# EAGLE board grbl_shift_register (EAGLE 9.2.0)
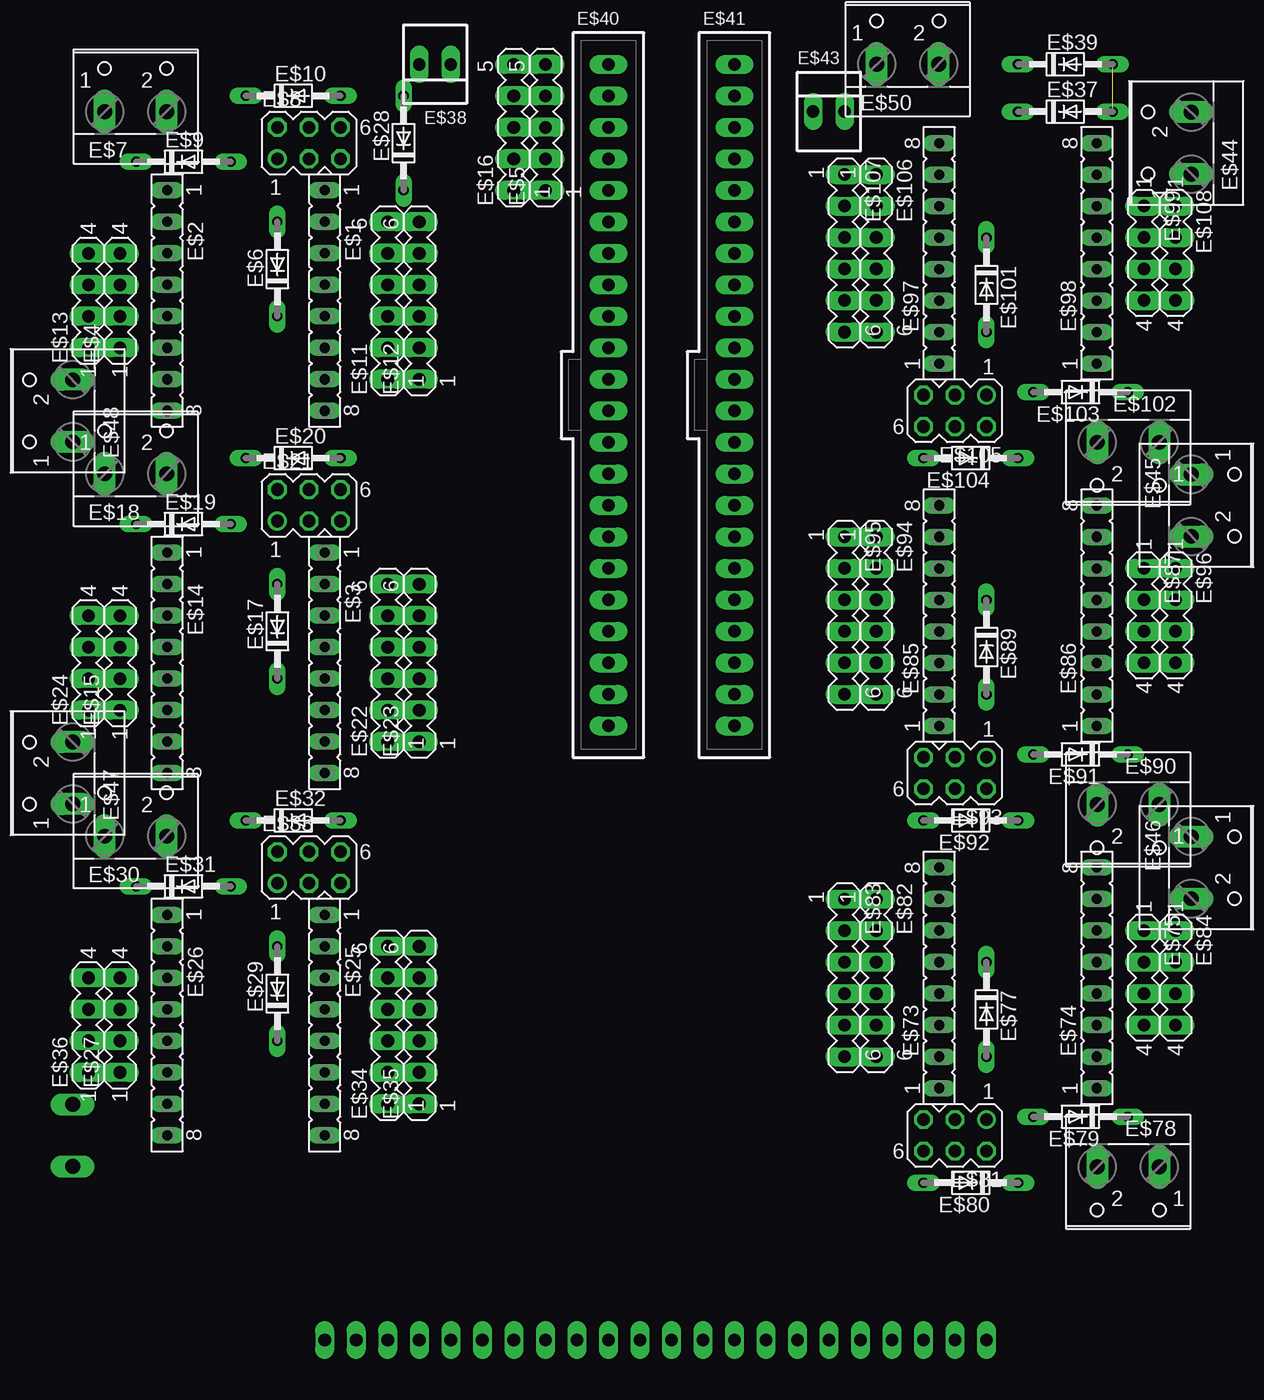
[diagram p0: board, top side]
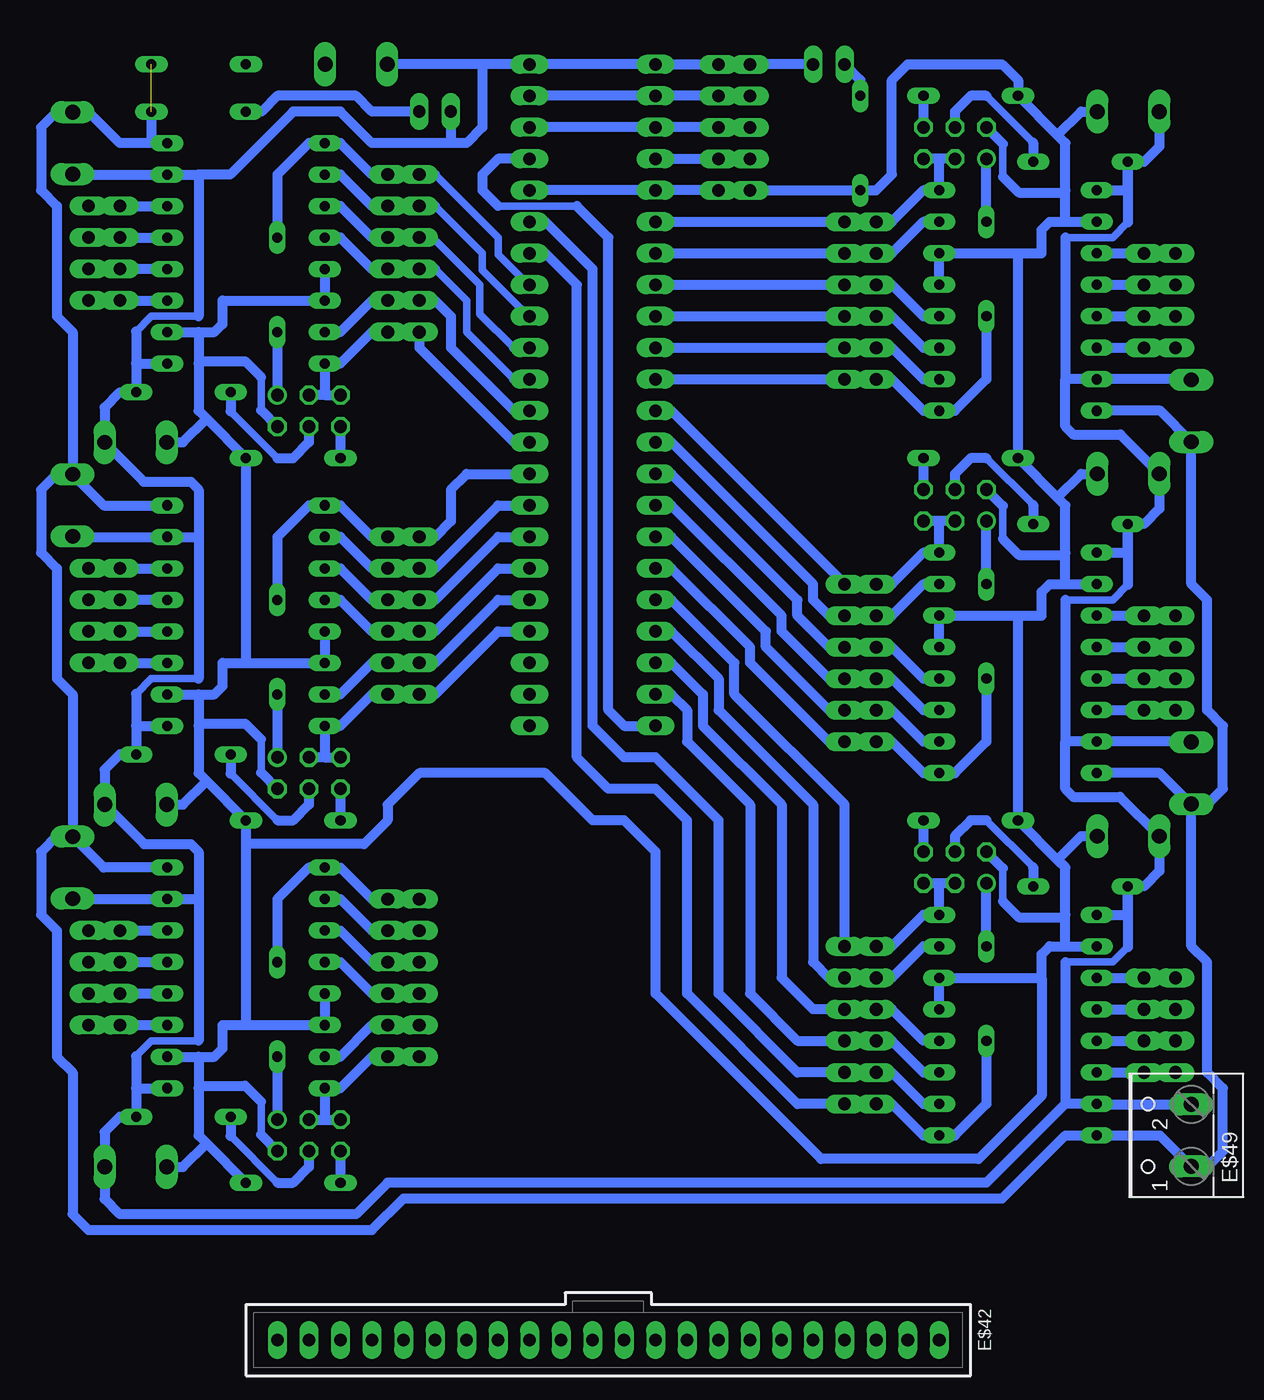
[diagram p1: board, bottom side, seen from below]

No outline drawn. Coordinates in mm, seen from the top.
Copper layers (1*16): Top 0.035mm / dielectric 1.5mm / Bottom 0.035mm
Design rules "default": minimum track width 6mil, minimum drill 0.35mm, track to track 6mil, track to pad 6mil, pad to pad 6mil, via to via 6mil, smd to smd 6mil, copper to edge 40mil, drill to drill 6mil, minimum pad ring 10mil, minimum via ring 8mil, stop-mask expansion 4mil, vias tented up to drill 0mil, thermal gap 10mil

## Footprints (pad centres in the part's own frame; a part is rotated, then mirrored left to right if it is on the bottom)
FE08 = drill 0.813 long: 1 -8.89,0; 2 -6.35,0; 3 -3.81,0; 4 -1.27,0; 5 1.27,0; 6 3.81,0; 7 6.35,0; 8 8.89,0
MA04-1 = drill 1.016 long: 1 -3.81,0; 2 -1.27,0; 3 1.27,0; 4 3.81,0
MA05-1 = drill 1.016 long: 1 -5.08,0; 2 -2.54,0; 3 0,0; 4 2.54,0; 5 5.08,0
DO34-7 = drill 0.813 long: A 3.81,0; C -3.81,0
W237-102 = drill 1.194 long: 1 -2.5,-1.27; 2 2.5,-1.27
MA03-2 = drill 1.016: 1 -2.54,-1.27 | drill 1.016 octagon: 2 -2.54,1.27; 3 0,-1.27; 4 0,1.27; 5 2.54,-1.27; 6 2.54,1.27
MA06-1 = drill 1.016 long: 1 -6.35,0; 2 -3.81,0; 3 -1.27,0; 4 1.27,0; 5 3.81,0; 6 6.35,0
22-23-2021 = drill 1 long: 1 -1.27,0; 2 1.27,0
70543-22 = drill 1.016 long: 1 -26.67,0; 2 -24.13,0; 3 -21.59,0; 4 -19.05,0; 5 -16.51,0; 6 -13.97,0; 7 -11.43,0; 8 -8.89,0; 9 -6.35,0; 10 -3.81,0; 11 -1.27,0; 12 1.27,0; 13 3.81,0; 14 6.35,0; 15 8.89,0; 16 11.43,0; 17 13.97,0; 18 16.51,0; 19 19.05,0; 20 21.59,0; 21 24.13,0; 22 26.67,0

## Placement (x,y rotation side)
E$1  [FE08]  30.48,74.93 270 top
E$2  [FE08]  17.78,74.93 270 top
E$3  [FE08]  30.48,45.72 270 top
E$4  [MA04-1]  13.97,74.93 90 top
E$5  [MA05-1]  48.26,88.9 90 top
E$6  [DO34-7]  26.67,77.47 90 top
E$7  [W237-102]  15.24,91.44 0 top
E$8  [MA03-2]  29.21,87.63 0 top
E$9  [DO34-7]  19.09,86.12 0 top
E$10  [DO34-7]  27.94,91.44 0 top
E$11  [MA06-1]  35.56,74.93 90 top
E$12  [MA06-1]  38.1,74.93 90 top
E$13  [MA04-1]  11.43,74.93 90 top
E$14  [FE08]  17.78,45.72 270 top
E$15  [MA04-1]  13.97,45.72 90 top
E$16  [MA05-1]  45.72,88.9 90 top
E$17  [DO34-7]  26.67,48.26 90 top
E$18  [W237-102]  15.24,62.23 0 top
E$19  [DO34-7]  19.09,56.91 0 top
E$20  [DO34-7]  27.94,62.23 0 top
E$21  [MA03-2]  29.21,58.42 0 top
E$22  [MA06-1]  35.56,45.72 90 top
E$23  [MA06-1]  38.1,45.72 90 top
E$24  [MA04-1]  11.43,45.72 90 top
E$25  [FE08]  30.48,16.51 270 top
E$26  [FE08]  17.78,16.51 270 top
E$27  [MA04-1]  13.97,16.51 90 top
E$28  [DO34-7]  36.83,87.63 90 top
E$29  [DO34-7]  26.67,19.05 90 top
E$30  [W237-102]  15.24,33.02 0 top
E$31  [DO34-7]  19.09,27.7 0 top
E$32  [DO34-7]  27.94,33.02 0 top
E$33  [MA03-2]  29.21,29.21 0 top
E$34  [MA06-1]  35.56,16.51 90 top
E$35  [MA06-1]  38.1,16.51 90 top
E$36  [MA04-1]  11.43,16.51 90 top
E$37  [DO34-7]  90.17,90.17 0 top
E$38  [22-23-2021]  39.37,93.98 180 top
E$39  [DO34-7]  90.17,93.98 0 top
E$40  [70543-22]  53.34,67.31 270 top
E$41  [70543-22]  63.5,67.31 270 top
E$42  [70543-22]  57.15,-8.89 180 bottom
E$43  [22-23-2021]  71.12,90.17 0 top
E$44  [W237-102]  99.06,87.63 90 top
E$45  [W237-102]  101.6,58.42 270 top
E$46  [W237-102]  101.6,29.21 270 top
E$47  [W237-102]  8.89,36.83 90 top
E$48  [W237-102]  8.89,66.04 90 top
E$49  [W237-102]  11.43,7.62 90 bottom
E$50  [W237-102]  77.47,95.25 0 top
E$73  [FE08]  80.01,20.32 90 top
E$74  [FE08]  92.71,20.32 90 top
E$75  [MA04-1]  96.52,20.32 270 top
E$77  [DO34-7]  83.82,17.78 270 top
E$78  [W237-102]  95.25,3.81 180 top
E$79  [DO34-7]  91.4,9.13 180 top
E$80  [DO34-7]  82.55,3.81 180 top
E$81  [MA03-2]  81.28,7.62 180 top
E$82  [MA06-1]  74.93,20.32 270 top
E$83  [MA06-1]  72.39,20.32 270 top
E$84  [MA04-1]  99.06,20.32 270 top
E$85  [FE08]  80.01,49.53 90 top
E$86  [FE08]  92.71,49.53 90 top
E$87  [MA04-1]  96.52,49.53 270 top
E$89  [DO34-7]  83.82,46.99 270 top
E$90  [W237-102]  95.25,33.02 180 top
E$91  [DO34-7]  91.4,38.34 180 top
E$92  [DO34-7]  82.55,33.02 180 top
E$93  [MA03-2]  81.28,36.83 180 top
E$94  [MA06-1]  74.93,49.53 270 top
E$95  [MA06-1]  72.39,49.53 270 top
E$96  [MA04-1]  99.06,49.53 270 top
E$97  [FE08]  80.01,78.74 90 top
E$98  [FE08]  92.71,78.74 90 top
E$99  [MA04-1]  96.52,78.74 270 top
E$101  [DO34-7]  83.82,76.2 270 top
E$102  [W237-102]  95.25,62.23 180 top
E$103  [DO34-7]  91.4,67.55 180 top
E$104  [DO34-7]  82.55,62.23 180 top
E$105  [MA03-2]  81.28,66.04 180 top
E$106  [MA06-1]  74.93,78.74 270 top
E$107  [MA06-1]  72.39,78.74 270 top
E$108  [MA04-1]  99.06,78.74 270 top

## Library data of the parts
E$1-E$3 E$14 E$25 E$26 E$73 E$74 E$85 E$86 E$97 E$98 = con-lsta
E$4 E$5 E$8 E$11-E$13 E$15 E$16 E$21-E$24 E$27 E$33-E$36 E$75 E$81-E$84 E$87 E$93-E$96 E$99 E$105-E$108 = con-lstb
E$6 E$9 E$10 E$17 E$19 E$20 E$28 E$29 E$31 E$32 E$37 E$39 E$77 E$79 E$80 E$89 E$91 E$92 E$101 E$103 E$104 = diode
E$7 E$18 E$30 E$44-E$50 E$78 E$90 E$102 = con-wago-500
E$38 E$40-E$43 = con-molex

## Nets
S$1: E$2.3 E$4.4 E$13.4
S$2: E$2.4 E$4.3 E$13.3
S$3: E$2.5 E$4.2 E$13.2
S$4: E$2.6 E$4.1 E$13.1
S$5: E$2.1 E$2.7 E$5.5 E$7.1 E$9.C E$14.1 E$14.7 E$16.5 E$18.1 E$19.C E$26.1 E$26.7 E$30.1 E$31.C E$38.1 E$40.1 E$41.1 E$43.1 E$44.1 E$45.2 E$46.2 E$47.2 E$48.2 E$49.2 E$50.1 E$74.1 E$74.7 E$78.1 E$79.C E$86.1 E$86.7 E$90.1 E$91.C E$98.1 E$98.7 E$102.1 E$103.C
S$6: E$1.3 E$1.4 E$2.2 E$3.3 E$3.4 E$5.1 E$7.2 E$8.2 E$10.C E$14.2 E$16.1 E$18.2 E$20.C E$21.2 E$25.3 E$25.4 E$26.2 E$28.C E$30.2 E$32.C E$33.2 E$40.5 E$41.5 E$73.3 E$73.4 E$74.2 E$78.2 E$80.C E$81.2 E$85.3 E$85.4 E$86.2 E$90.2 E$92.C E$93.2 E$97.3 E$97.4 E$98.2 E$102.2 E$104.C E$105.2
S$7: E$1.8 E$6.C E$11.1 E$12.1 E$40.11
S$8: E$1.1 E$8.3 E$8.5 E$11.6 E$12.6 E$40.6
S$9: E$6.A E$8.1
S$10: E$8.6 E$10.A
S$11: E$8.4 E$9.A
S$12: E$1.5 E$11.4 E$12.4 E$40.8
S$13: E$1.6 E$11.3 E$12.3 E$40.9
S$14: E$1.7 E$11.2 E$12.2 E$40.10
S$15: E$1.2 E$11.5 E$12.5 E$40.7
S$16: E$14.3 E$15.4 E$24.4
S$17: E$14.4 E$15.3 E$24.3
S$18: E$14.5 E$15.2 E$24.2
S$19: E$14.6 E$15.1 E$24.1
S$20: E$26.3 E$27.4 E$36.4
S$21: E$26.4 E$27.3 E$36.3
S$22: E$3.8 E$17.C E$22.1 E$23.1 E$40.17
S$23: E$3.1 E$21.3 E$21.5 E$22.6 E$23.6 E$40.12
S$24: E$17.A E$21.1
S$25: E$20.A E$21.6
S$26: E$19.A E$21.4
S$27: E$3.5 E$22.4 E$23.4 E$40.14
S$28: E$3.6 E$22.3 E$23.3 E$40.15
S$29: E$3.7 E$22.2 E$23.2 E$40.16
S$30: E$3.2 E$22.5 E$23.5 E$40.13
S$31: E$26.5 E$27.2 E$36.2
S$32: E$26.6 E$27.1 E$36.1
S$33: E$5.4 E$16.4 E$40.2 E$41.2
S$34: E$5.3 E$16.3 E$40.3 E$41.3
S$35: E$25.8 E$29.C E$34.1 E$35.1 E$41.7
S$36: E$25.1 E$33.3 E$33.5 E$34.6 E$35.6 E$40.18
S$37: E$29.A E$33.1
S$38: E$32.A E$33.6
S$39: E$31.A E$33.4
S$40: E$25.5 E$34.4 E$35.4 E$40.20
S$41: E$25.6 E$34.3 E$35.3 E$40.21
S$42: E$25.7 E$34.2 E$35.2 E$41.6
S$43: E$25.2 E$34.5 E$35.5 E$40.19
S$44: E$28.A E$38.2
S$45: E$40.22 E$41.4
S$46: E$41.9 E$97.7 E$106.2 E$107.2
S$47: E$41.10 E$97.6 E$106.3 E$107.3
S$48: E$5.2 E$16.2 E$40.4
S$49: E$2.8 E$14.8 E$26.8 E$37.A E$39.A E$44.2 E$45.1 E$46.1 E$47.1 E$48.1 E$49.1 E$74.8 E$86.8 E$98.8
S$50: E$37.C E$43.2
S$85: E$74.3 E$75.4 E$84.4
S$86: E$74.4 E$75.3 E$84.3
S$87: E$74.5 E$75.2 E$84.2
S$88: E$74.6 E$75.1 E$84.1
S$89: E$73.8 E$77.C E$82.1 E$83.1
S$90: E$73.1 E$81.3 E$81.5 E$82.6 E$83.6
S$91: E$77.A E$81.1
S$92: E$80.A E$81.6
S$93: E$79.A E$81.4
S$94: E$73.5 E$82.4 E$83.4
S$95: E$73.6 E$82.3 E$83.3
S$96: E$73.7 E$82.2 E$83.2
S$97: E$73.2 E$82.5 E$83.5
S$98: E$86.3 E$87.4 E$96.4
S$99: E$86.4 E$87.3 E$96.3
S$100: E$86.5 E$87.2 E$96.2
S$101: E$86.6 E$87.1 E$96.1
S$102: E$41.14 E$85.8 E$89.C E$94.1 E$95.1
S$103: E$41.19 E$85.1 E$93.3 E$93.5 E$94.6 E$95.6
S$104: E$89.A E$93.1
S$105: E$92.A E$93.6
S$106: E$91.A E$93.4
S$107: E$41.17 E$85.5 E$94.4 E$95.4
S$108: E$41.16 E$85.6 E$94.3 E$95.3
S$109: E$41.15 E$85.7 E$94.2 E$95.2
S$110: E$41.18 E$85.2 E$94.5 E$95.5
S$111: E$98.3 E$99.4 E$108.4
S$112: E$98.4 E$99.3 E$108.3
S$113: E$98.5 E$99.2 E$108.2
S$114: E$98.6 E$99.1 E$108.1
S$115: E$41.8 E$97.8 E$101.C E$106.1 E$107.1
S$116: E$41.13 E$97.1 E$105.3 E$105.5 E$106.6 E$107.6
S$117: E$101.A E$105.1
S$118: E$104.A E$105.6
S$119: E$103.A E$105.4
S$120: E$41.11 E$97.5 E$106.4 E$107.4
S$123: E$41.12 E$97.2 E$106.5 E$107.5

## Tracks (layer width: path | path; a pad name or v marks a point on that pad's centre or on a via)
S$1
  Bottom 0.813: E$2.3 E$4.4 E$13.4
S$2
  Bottom 0.813: E$2.4 E$4.3 E$13.3
S$3
  Bottom 0.813: E$2.5 E$4.2 E$13.2
S$4
  Bottom 0.813: E$2.6 E$4.1 E$13.1
S$5
  Bottom 0.61: 15.28,81.24 16.51,80.01 20.32,80.01 | 15.28,52.03 16.51,50.8 20.32,50.8 | 15.28,22.82 16.51,21.59 20.32,21.59 | 90.17,15.24 93.98,15.24 95.21,14.01 | 90.17,44.45 93.98,44.45 95.21,43.22 | 90.17,73.66 93.98,73.66 95.21,72.43
  Bottom 0.813: E$38.1 E$16.5 E$5.5 E$40.1 E$41.1 67.31,93.98 | E$7.1 12.74,87.35 13.97,86.12 E$9.C | E$2.1 15.28,83.82 E$9.C | E$9.C 15.28,81.24 | 20.32,68.58 E$2.7 10.2,68.58 E$48.2 | 20.32,80.01 20.32,68.58 | 20.32,68.58 20.32,64.77 19.68,64.14 15.88,64.14 12.74,61 E$18.1 12.74,58.14 13.97,56.91 E$19.C | E$14.1 15.28,54.61 E$19.C | E$19.C 15.28,52.03 | 20.32,39.37 E$14.7 10.2,39.37 E$47.2 | 20.32,50.8 20.32,39.37 | 20.32,39.37 20.32,35.56 19.68,34.92 15.91,34.92 E$30.1 12.74,28.93 13.97,27.7 E$31.C | E$26.1 15.28,25.4 E$31.C | E$31.C 15.28,22.82 | 20.32,21.59 20.32,10.16 | 20.32,10.16 E$26.7 17.74,10.12 E$49.2 | 90.17,26.67 E$74.7 100.29,26.67 E$46.2 | 95.21,14.01 E$79.C | 90.17,26.67 90.17,15.24 | E$79.C 96.52,9.13 97.75,7.9 E$78.1 | E$74.1 95.21,11.43 E$79.C | E$78.1 97.75,5.04 | 90.17,55.88 E$86.7 100.29,55.88 E$45.2 | 95.21,43.22 E$91.C | 90.17,55.88 90.17,44.45 | E$91.C 96.52,38.34 97.75,37.11 E$90.1 94.58,31.11 90.81,31.11 90.17,30.48 90.17,26.67 | E$86.1 95.21,40.64 E$91.C | 90.17,85.09 E$98.7 100.29,85.09 E$44.1 | 95.21,72.43 E$103.C | 90.17,85.09 90.17,73.66 | E$103.C 96.52,67.55 97.75,66.32 E$102.1 97.75,63.46 94.61,60.33 90.81,60.33 90.17,59.69 90.17,55.88 | E$98.1 95.21,69.85 E$103.C | 20.32,10.16 26.67,3.81 74.93,3.81 77.47,1.27 96.52,1.27 97.75,2.5 E$78.1 | 67.31,93.98 67.31,88.9 68.58,87.63 69.85,87.63 | 90.17,85.09 87.63,85.09 82.55,90.17 78.74,90.17 76.2,87.63 69.85,87.63 | E$43.1 69.85,87.63 | 67.31,93.98 E$50.1
S$6
  Bottom 0.61: 25.35,87.58 25.35,84.91 | 25.35,58.37 25.35,55.7 | 25.35,29.16 25.35,26.49 | 85.14,68.76 85.14,66.09 | 85.14,10.34 85.14,7.67 | 85.14,39.55 85.14,36.88
  Bottom 0.813: E$1.4 E$1.3 24.13,78.74 | 24.13,78.74 22.23,78.74 22.23,80.64 21.59,81.28 20.32,81.28 | 20.32,81.28 E$2.2 | 20.95,88.27 19.05,90.17 E$7.2 | 20.32,81.28 20.32,83.82 | 20.32,83.82 20.32,87.63 20.95,88.27 | E$8.2 25.35,87.58 | 25.35,84.91 24.07,83.63 20.51,83.63 20.32,83.82 | 20.95,88.27 E$10.C 24.13,92.71 25.4,93.98 33.02,93.98 34.29,92.71 34.29,85.09 35.56,83.82 E$28.C E$16.1 E$5.1 E$40.5 E$41.5 | E$3.4 E$3.3 24.13,49.53 | 24.13,49.53 22.23,49.53 22.23,51.44 21.59,52.07 20.32,52.07 | 20.32,52.07 E$14.2 | 20.95,59.05 19.05,60.96 E$18.2 | 20.32,52.07 20.32,54.61 | 20.32,54.61 20.32,58.42 20.95,59.05 | E$21.2 25.35,58.37 | 25.35,55.7 24.07,54.42 20.51,54.42 20.32,54.61 | 20.95,59.05 E$20.C 24.13,78.74 | E$25.4 E$25.3 22.23,20.32 | 20.32,22.86 21.59,22.86 22.23,22.23 22.23,20.32 | 20.32,22.86 E$26.2 | 20.95,29.84 19.05,31.75 E$30.2 | 20.32,22.86 20.32,25.4 | 20.32,25.4 20.32,29.21 20.95,29.84 | E$33.2 25.35,29.16 | 25.35,26.49 24.07,25.21 20.51,25.21 20.32,25.4 | 20.95,29.84 E$32.C 24.13,49.53 | E$97.4 E$97.3 88.27,74.93 88.27,73.03 88.9,72.39 90.17,72.39 | 85.14,66.09 E$105.2 | 85.14,68.76 86.42,70.04 89.98,70.04 90.17,69.85 | E$98.2 90.17,72.39 | 90.17,72.39 90.17,69.85 | 90.17,69.85 90.17,66.04 89.53,65.41 | E$102.2 91.44,63.5 89.53,65.41 | 85.14,7.67 E$81.2 | E$78.2 91.44,5.08 89.53,6.99 | 89.53,65.41 E$104.C 86.36,45.72 | E$85.4 E$85.3 86.36,45.72 | 89.53,6.99 E$80.C | 85.14,10.34 86.42,11.62 89.98,11.62 90.17,11.43 | 89.53,6.99 90.17,7.62 90.17,11.43 | 86.36,45.72 88.27,45.72 88.27,43.81 88.9,43.18 90.17,43.18 | 85.14,36.88 E$93.2 | E$74.2 90.17,13.97 | 90.17,13.97 90.17,11.43 | 85.14,39.55 86.42,40.83 89.98,40.83 90.17,40.64
  Bottom 0.813: E$86.2 90.17,43.18 | 90.17,13.97 88.9,13.97 88.27,14.61 88.27,16.51 86.36,16.51 | 90.17,43.18 90.17,40.64 | 90.17,40.64 90.17,36.83 89.53,36.2 | E$90.2 91.44,34.29 89.53,36.2 | E$73.4 E$73.3 86.36,16.51 | 89.53,36.2 E$92.C 86.36,31.11 | 86.36,31.11 86.36,16.51 | 22.23,20.32 22.23,10.79 27.3,5.71 40.01,5.71 53.34,19.05 53.34,30.48 55.88,33.02 58.42,33.02 62.23,36.83 72.39,36.83 74.93,34.29 74.93,33.02 76.83,31.11 86.36,31.11
S$7
  Bottom 0.813: E$6.C 26.67,68.58 29.21,66.04 E$1.8 31.75,66.04 34.29,68.58 E$11.1 E$12.1 E$40.11
S$8
  Bottom 0.813: E$8.3 30.48,86.36 | 30.48,86.36 E$8.5 | 30.48,86.36 E$1.1 31.75,83.82 34.29,81.28 E$11.6 E$12.6 E$40.6
S$9
  Bottom 0.813: E$6.A E$8.1
S$10
  Bottom 0.813: E$10.A E$8.6
S$11
  Bottom 0.61: 22.9,87.67 26.67,91.44
  Bottom 0.813: 22.9,87.67 E$9.A | 26.67,91.44 27.94,91.44 29.21,90.17 E$8.4
S$12
  Bottom 0.813: E$1.5 31.75,73.66 34.29,76.2 E$11.4 E$12.4 E$40.8
S$13
  Bottom 0.813: E$1.6 31.75,71.12 34.29,73.66 E$11.3 E$12.3 E$40.9
S$14
  Bottom 0.813: E$1.7 31.75,68.58 34.29,71.12 E$11.2 E$12.2 E$40.10
S$15
  Bottom 0.813: E$1.2 31.75,81.28 34.29,78.74 E$11.5 E$12.5 E$40.7
S$16
  Bottom 0.813: E$14.3 E$15.4 E$24.4
S$17
  Bottom 0.813: E$14.4 E$15.3 E$24.3
S$18
  Bottom 0.813: E$14.5 E$15.2 E$24.2
S$19
  Bottom 0.813: E$14.6 E$15.1 E$24.1
S$20
  Bottom 0.813: E$26.3 E$27.4 E$36.4
S$21
  Bottom 0.813: E$26.4 E$27.3 E$36.3
S$22
  Bottom 0.813: E$17.C 26.67,39.37 29.21,36.83 E$3.8 31.75,36.83 34.29,39.37 E$22.1 E$23.1 39.37,39.37 45.72,45.72 45.72,46.99 52.07,53.34 E$40.17
S$23
  Bottom 0.813: E$21.3 30.48,57.15 | 30.48,57.15 E$21.5 | 30.48,57.15 E$3.1 31.75,54.61 34.29,52.07 E$22.6 E$23.6 52.07,66.04 E$40.12
S$24
  Bottom 0.813: E$17.A E$21.1
S$25
  Bottom 0.813: E$20.A E$21.6
S$26
  Bottom 0.61: 22.9,58.46 26.67,62.23
  Bottom 0.813: 22.9,58.46 E$19.A | 26.67,62.23 27.94,62.23 29.21,60.96 E$21.4
S$27
  Bottom 0.813: E$3.5 31.75,44.45 34.29,46.99 E$22.4 E$23.4 39.37,46.99 41.91,49.53 41.91,50.8 52.07,60.96 E$40.14
S$28
  Bottom 0.813: E$3.6 31.75,41.91 34.29,44.45 E$22.3 E$23.3 39.37,44.45 43.18,48.26 43.18,49.53 52.07,58.42 E$40.15
S$29
  Bottom 0.813: E$3.7 31.75,39.37 34.29,41.91 E$22.2 E$23.2 39.37,41.91 44.45,46.99 44.45,48.26 52.07,55.88 E$40.16
S$30
  Bottom 0.813: E$3.2 31.75,52.07 34.29,49.53 E$22.5 E$23.5 39.37,49.53 40.64,50.8 40.64,52.07 52.07,63.5 E$40.13
S$31
  Bottom 0.813: E$26.5 E$27.2 E$36.2
S$32
  Bottom 0.813: E$26.6 E$27.1 E$36.1
S$33
  Bottom 0.813: E$41.2 E$40.2 E$5.4 E$16.4
S$34
  Bottom 0.813: E$41.3 E$40.3 E$5.3 E$16.3
S$35
  Bottom 0.813: E$29.C 26.67,10.16 29.21,7.62 E$25.8 31.75,7.62 34.29,10.16 E$34.1 E$35.1 41.91,10.16 50.8,19.05 50.8,33.02 53.34,35.56 57.15,35.56 59.69,38.1 59.69,76.2 62.23,78.74 E$41.7
S$36
  Bottom 0.813: E$33.3 30.48,27.94 | 30.48,27.94 E$33.5 | 30.48,27.94 E$25.1 31.75,25.4 34.29,22.86 E$34.6 E$35.6 38.1,34.29 46.99,43.18 46.99,45.72 52.07,50.8 E$40.18
S$37
  Bottom 0.813: E$29.A E$33.1
S$38
  Bottom 0.813: E$32.A E$33.6
S$39
  Bottom 0.61: 22.9,29.25 26.67,33.02
  Bottom 0.813: 22.9,29.25 E$31.A | 26.67,33.02 27.94,33.02 29.21,31.75 E$33.4
S$40
  Bottom 0.813: E$25.5 31.75,15.24 34.29,17.78 E$34.4 E$35.4 40.64,17.78 43.18,20.32 43.18,34.29 49.53,40.64 49.53,43.18 52.07,45.72 E$40.20
S$41
  Bottom 0.813: E$25.6 31.75,12.7 34.29,15.24 E$34.3 E$35.3 41.91,15.24 45.72,19.05 45.72,34.29 50.8,39.37 50.8,41.91 52.07,43.18 E$40.21
S$42
  Bottom 0.813: E$25.7 31.75,10.16 34.29,12.7 E$34.2 E$35.2 41.91,12.7 48.26,19.05 48.26,33.02 53.34,38.1 55.88,38.1 58.42,40.64 58.42,77.47 62.23,81.28 E$41.6
S$43
  Bottom 0.813: E$25.2 31.75,22.86 34.29,20.32 E$34.5 E$35.5 39.37,20.32 40.64,21.59 40.64,34.29 48.26,41.91 48.26,44.45 52.07,48.26 E$40.19
S$44
  Bottom 0.813: E$28.A 36.83,92.71 E$38.2
S$45
  Bottom 0.61: 66.04,82.55 64.86,82.55 62.14,82.55 59.69,82.55
  Bottom 0.813: E$40.22 55.88,40.64 57.15,41.91 57.15,80.01 59.69,82.55 | E$41.4 66.04,86.36 67.31,85.09 67.31,83.82 66.04,82.55
S$46
  Bottom 0.61: 71.12,82.55 67.31,78.74 67.31,77.38 63.59,73.66
  Bottom 0.813: E$97.7 78.74,85.09 76.2,82.55 E$106.2 E$107.2 71.12,82.55 | E$41.9 63.59,73.66
S$47
  Bottom 0.61: 64.77,71.12 67.5,73.84 67.5,76.2 71.31,80.01 E$107.3
  Bottom 0.813: E$41.10 64.77,71.12 | E$97.6 78.74,82.55 76.2,80.01 E$106.3 E$107.3
S$48
  Bottom 0.813: E$16.2 E$5.2 E$40.4
S$49  (1 unrouted)
  Bottom 0.813: E$98.8 93.98,87.63 | 93.98,87.63 96.52,87.63 99.06,90.17 100.29,90.17 E$44.2 101.56,90.13 101.6,90.17 102.87,88.9 102.87,83.82 101.6,82.55 101.6,73.66 100.33,72.39 E$45.1 | E$45.1 97.83,58.42 E$86.8 | E$45.1 101.56,60.92 101.6,60.96 102.87,59.69 102.87,54.61 101.6,53.34 101.6,44.45 100.33,43.18 E$46.1 | E$46.1 97.83,29.21 E$74.8 | E$46.1 101.56,31.71 101.6,31.75 102.87,30.48 102.87,25.4 101.6,24.13 101.6,13.97 100.33,12.7 100.33,1.27 99.06,0 76.2,0 73.66,2.54 25.4,2.54 20.32,7.62 E$26.8 12.7,7.62 10.2,5.12 E$49.1 10.12,5.08 8.89,5.08 7.62,6.35 7.62,11.43 8.89,12.7 8.89,21.59 10.16,22.86 E$47.1 | E$47.1 10.2,34.33 12.7,36.83 E$14.8 | E$47.1 10.12,34.29 8.89,34.29 7.62,35.56 7.62,40.64 8.89,41.91 8.89,50.8 10.16,52.07 E$48.1 12.66,66.04 E$2.8 | E$37.A 93.98,87.63
S$50
  Bottom 0.813: E$43.2 76.2,90.17 77.47,91.44 83.82,91.44 85.09,90.17 E$37.C
S$85
  Bottom 0.813: E$74.3 E$75.4 E$84.4
S$86
  Bottom 0.813: E$74.4 E$75.3 E$84.3
S$87
  Bottom 0.813: E$74.5 E$75.2 E$84.2
S$88
  Bottom 0.813: E$74.6 E$75.1 E$84.1
S$89
  Bottom 0.813: E$77.C 83.82,26.67 81.28,29.21 E$73.8 78.74,29.21 76.2,26.67 E$82.1 E$83.1
S$90
  Bottom 0.813: E$81.3 80.01,8.89 | 80.01,8.89 E$81.5 | 80.01,8.89 E$73.1 78.74,11.43 76.2,13.97 E$82.6 E$83.6
S$91
  Bottom 0.813: E$77.A E$81.1
S$92
  Bottom 0.813: E$81.6 E$80.A
S$93
  Bottom 0.61: 87.59,7.58 83.82,3.81
  Bottom 0.813: E$79.A 87.59,7.58 | 83.82,3.81 82.55,3.81 81.28,5.08 E$81.4
S$94
  Bottom 0.813: E$73.5 78.74,21.59 76.2,19.05 E$82.4 E$83.4
S$95
  Bottom 0.813: E$73.6 78.74,24.13 76.2,21.59 E$82.3 E$83.3
S$96
  Bottom 0.813: E$73.7 78.74,26.67 76.2,24.13 E$82.2 E$83.2
S$97
  Bottom 0.813: E$73.2 78.74,13.97 76.2,16.51 E$82.5 E$83.5
S$98
  Bottom 0.813: E$86.3 E$87.4 E$96.4
S$99
  Bottom 0.813: E$86.4 E$87.3 E$96.3
S$100
  Bottom 0.813: E$96.2 E$87.2 E$86.5
S$101
  Bottom 0.813: E$86.6 E$87.1 E$96.1
S$102
  Bottom 0.813: E$89.C 83.82,55.88 81.28,58.42 E$85.8 78.74,58.42 76.2,55.88 E$94.1 E$95.1 71.12,55.88 69.85,57.15 69.85,59.69 68.58,60.96 E$41.14
S$103
  Bottom 0.813: 80.01,38.1 E$93.5 | 80.01,38.1 E$85.1 78.74,40.64 76.2,43.18 E$94.6 E$95.6 71.12,43.18 66.04,48.26 E$41.19 | 80.01,38.1 E$93.3
S$104
  Bottom 0.813: E$89.A E$93.1
S$105
  Bottom 0.813: E$93.6 E$92.A
S$106
  Bottom 0.61: 87.59,36.79 83.82,33.02
  Bottom 0.813: E$91.A 87.59,36.79 | 83.82,33.02 82.55,33.02 81.28,34.29 E$93.4
S$107
  Bottom 0.813: E$85.5 78.74,50.8 76.2,48.26 E$94.4 E$95.4 71.12,48.26 66.04,53.34 E$41.17
S$108
  Bottom 0.813: E$85.6 78.74,53.34 76.2,50.8 E$94.3 E$95.3 71.12,50.8 66.04,55.88 E$41.16
S$109
  Bottom 0.813: E$85.7 78.74,55.88 76.2,53.34 E$94.2 E$95.2 71.12,53.34 66.04,58.42 E$41.15
S$110
  Bottom 0.813: E$85.2 78.74,43.18 76.2,45.72 E$94.5 E$95.5 71.12,45.72 66.04,50.8 E$41.18
S$111
  Bottom 0.813: E$98.3 E$99.4 E$108.4
S$112
  Bottom 0.813: E$108.3 E$99.3 E$98.4
S$113
  Bottom 0.813: E$98.5 E$99.2 E$108.2
S$114
  Bottom 0.813: E$98.6 E$99.1 E$108.1
S$115
  Bottom 0.61: 71.12,85.09 66.04,80.01 66.04,78.65 63.59,76.2
  Bottom 0.813: E$101.C 83.82,85.09 81.28,87.63 E$97.8 78.74,87.63 76.2,85.09 E$106.1 E$107.1 71.12,85.09 | E$41.8 63.59,76.2
S$116
  Bottom 0.813: 80.01,67.31 E$105.5 | 80.01,67.31 E$97.1 78.74,69.85 76.2,72.39 E$106.6 E$107.6 72.39,71.12 64.77,63.5 E$41.13 | 80.01,67.31 E$105.3
S$117
  Bottom 0.813: E$101.A E$105.1
S$118
  Bottom 0.813: E$105.6 E$104.A
S$119
  Bottom 0.61: 87.59,66 83.82,62.23
  Bottom 0.813: E$103.A 87.59,66 | 83.82,62.23 82.55,62.23 81.28,63.5 E$105.4
S$120
  Bottom 0.61: 71.12,77.47 68.58,74.93 68.58,72.39 64.77,68.58
  Bottom 0.813: E$97.5 78.74,80.01 76.2,77.47 E$106.4 E$107.4 71.12,77.47 | 64.77,68.58 E$41.11
S$123
  Bottom 0.813: E$97.2 78.74,72.39 76.2,74.93 E$106.5 E$107.5 71.12,74.93 69.85,73.66 69.85,71.12 64.77,66.04 E$41.12